# Altium PCB Control Board.PcbDoc
Units mm, origin at the board's own origin, x right, y up, seen from the top; angles counter-clockwise.
Board outline 33 x 89 mm, 2 copper layers (Top Layer, Bottom Layer); 29 components, 59 nets, 122 pads, 0 vias.
Unrouted connection lines stored in the file: 69.
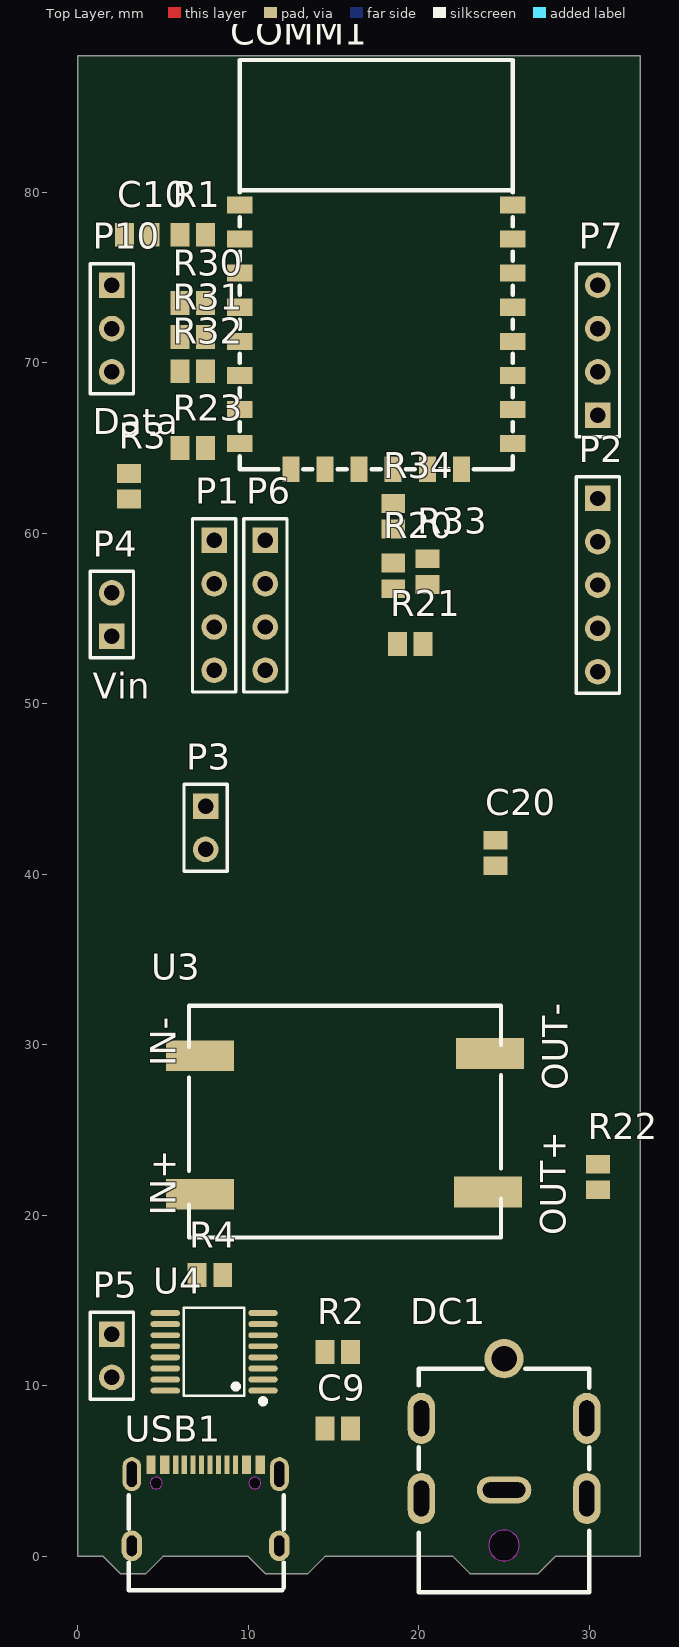
[diagram p0: Top Layer view]
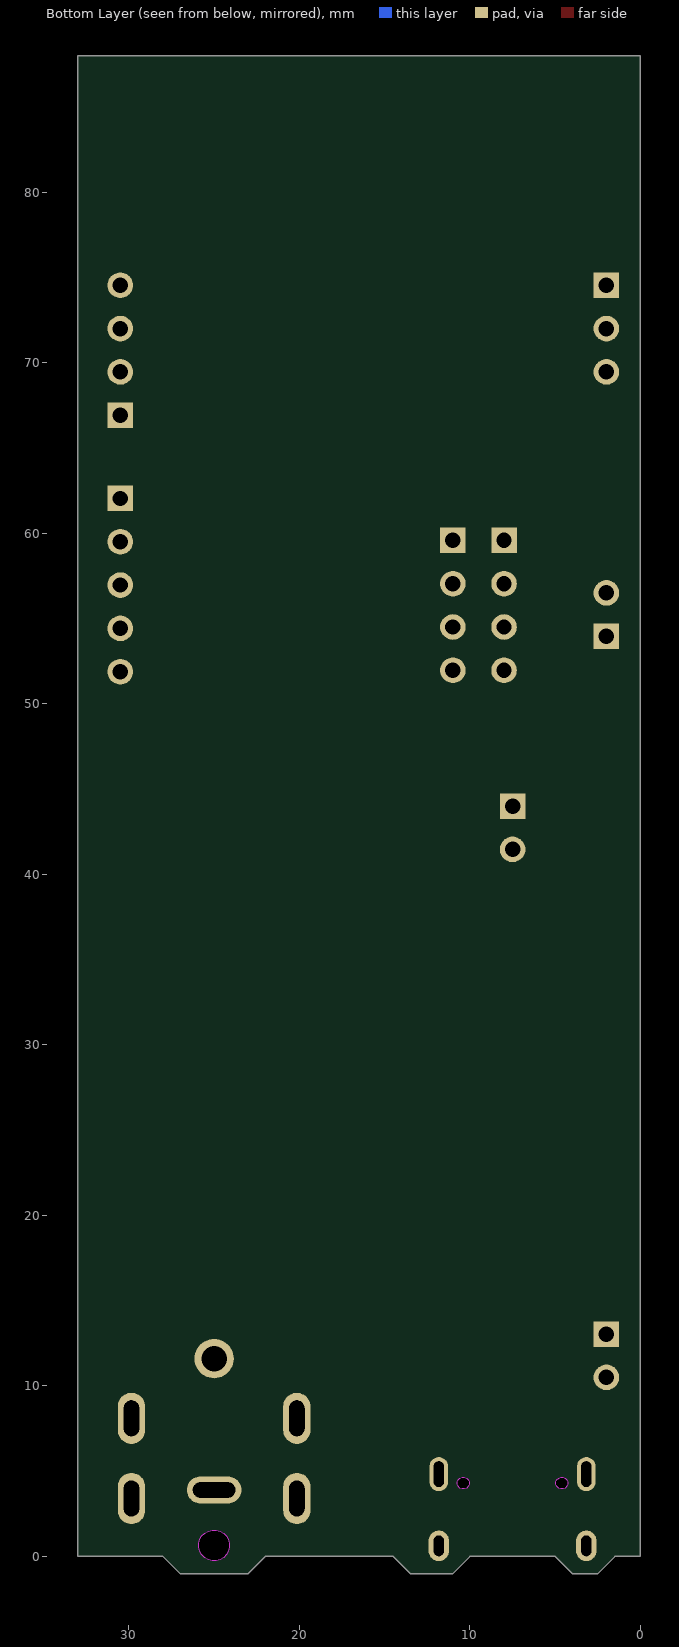
[diagram p1: Bottom Layer view, seen from below]

## Layer stack, top to bottom
Top Solder: solder mask 0.0102, Solder Resist, Dk 3.5
Top Layer: signal copper 0.0356
Dielectric 1: dielectric 0.32, FR-4, Dk 4.8
Bottom Layer: signal copper 0.0356
Bottom Solder: solder mask 0.0102, Solder Resist, Dk 3.5

## Board outline
10,0 11,-1 13.5,-1 14.5,0 22,0 23,-1 27,-1 28,0 33,0 33,88 0,88 0,0 1.5,0 2.5,-1 4,-1 5,0

## Design rules (kind name [scope] priority, off if disabled: settings)
Clearance [All] p1: gap=0.254 ignorepadtopadclearanceinfootprint=FALSE except(0: Arc-Hole Track-Hole SMDPad-Hole THPad-Hole Via-Hole Fill-Hole Poly-Hole Region-Hole Text-Hole)
PolygonConnect [All] p1: connectstyle=Relief reliefconductorwidth=0.254 reliefentries=4 polygonreliefangle="90 Angle" airgapwidth=0.254
RoomDefinition "Control Board" [InComponentClass('Control Board')] p1: confinementstyle=ConfineIn formatcopy=TRUE lockcomponents=FALSE outline 0,-2.5 33,-2.5 33,88 0,88
RoutingVias [All] p1: holewidth=0.711 width=1.27 viastyle="Through Hole" minholewidth=0.711 minwidth=1.27 maxholewidth=0.711 maxwidth=1.27
SolderMaskExpansion [All] p1: expansion=0.102 istentingtop=FALSE
Width [All] p1: maxlimit=0.254 minlimit=0.254 preferedwidth=0.254
30 further rules are at their usual default settings.

## Components (designator, comment, footprint, x,y, rotation, side; value= is the part's Value field where it differs from the comment)
C9 "Cap" C0805 15.25,7.5 r0 top value=1μF
C10 "Cap" C0805 3.5,77.5 r180 top value=1μF
C20 "Cap" C0805 24.5,41.25 r90 top value=0.1μF
COMM1 "PB-03F" BULETM-SMD_PB-03F 17.5,71.5 r0 top
DC1 "DC-042C-Z-2.5-A" DC-IN-TH_DC-042C-Z-2.5-A 25,7.5 r90 top
P1 "CH340 Write" HDR1X4 8,59.58 r270 top
P2 "Encoder" HDR1X5 30.5,62.04 r270 top
P3 "Thermo" HDR1X2 7.5,44 r270 top
P4 "Vin" HDR1X2 2,53.96 r90 top
P5 "Switch" HDR1X2 2,13.04 r270 top
P6 "Fan Header" HDR1X4 11,59.58 r270 top
P7 "Display" HDR1X4 30.5,66.92 r90 top
P10 "Data" HDR1X3 2,74.54 r270 top
R1 "Res1" C0805 6.75,77.5 r0 top value=20K
R2 "Res1" C0805 15.25,12 r180 top value=3K
R3 "Res1" C0805 3,62.75 r90 top value=5.1K
R4 "Res1" C0805 7.75,16.5 r0 top value=5.1K
R20 "Res1" C0805 18.5,57.5 r90 top value=10K
R21 "Res1" C0805 19.5,53.5 r0 top value=10K
R22 "Res1" C0805 30.5,22.25 r90 top value=10K
R23 "Res1" C0805 6.75,65 r180 top value=2K
R30 "Res1" C0805 6.75,73.5 r180 top value=100Ω
R31 "Res1" C0805 6.75,71.5 r0 top value=100Ω
R32 "Res1" C0805 6.75,69.5 r180 top value=100Ω
R33 "Res1" C0805 20.5,57.75 r90 top value=100Ω
R34 "Res1" C0805 18.5,61 r270 top value=100Ω
U3 "" "PCBComponent_1 - duplicate" 16.5,25.5 r0 top
U4 "IP2721" TSSOP-16_L5.0-W4.4-P0.65-LS6.4-BL 8,12 r90 top
USB1 "TYPE-C 16PIN 2MD(073)" USB-C-SMD_TYPE-C-6PIN-2MD-073 7.5,3 r0 top

## Footprints (in the part's own frame and the unit in brackets; to place one, negate y for a bottom-side part, rotate by r counter-clockwise, add the part's x,y. Pads: shape width x height; smd on the part's side, far side on the other; paste and mask are expansions set on the pad)
BULETM-SMD_PB-03F [mm]
  rect 1.5x1 smd paste+0 mask+0.05: 1(-8,7.75) 2(-8,5.75) 3(-8,3.75) 4(-8,1.75) 5(-8,-0.25) 6(-8,-2.25) 7(-8,-4.25) 8(-8,-6.25) 15(8,-6.25) 16(8,-4.25) 17(8,-2.25) 18(8,-0.25) 19(8,1.75) 20(8,3.75) 21(8,5.75) 22(8,7.75)
  rect 1x1.5 smd paste+0 mask+0.05: 9(-5,-7.75) 10(-3,-7.75) 11(-1,-7.75) 12(1,-7.75) 13(3,-7.75) 14(5,-7.75)
  silkscreen extent -8,-7.75 8,16.25
C0805 [mm] "Chip Capacitor, Body 2.0x1.3mm, IPC High Density"
  rect 1.1x1.4 smd: 1(-0.75,0) 2(0.75,0)
  body extent -1.1,-0.72 1.1,0.72, height 1.4
DC-IN-TH_DC-042C-Z-2.5-A [mm]
  oval 3x1.6 hole 0.9 slot 2.1 at 0 deg copper offset 0,0: 1(-4.1,-4.85) 1(-4.1,4.85) 1(0.6,4.85) 1(0.6,-4.85)
  oval 1.6x3.2 hole 0.9 slot 2.5 at 90 deg: 2(-3.6,0)
  round 2.3 hole 1.5 copper offset 0,0: 3(4.1,0)
  Keep-Out Layer board cut-out: -5.95,0 -5.95,0.119 -6.011,0.348 -6.13,0.553 -6.298,0.72 -6.503,0.839 -6.732,0.9 -6.969,0.9 -7.198,0.839 -7.403,0.72 -7.57,0.553 -7.689,0.347 -7.75,0.119 -7.75,0 -7.75,-0.118 -7.689,-0.347 -7.57,-0.553 -7.403,-0.72 -7.198,-0.839 -6.969,-0.9 -6.732,-0.9 -6.503,-0.839 -6.298,-0.72 -6.13,-0.552 -6.011,-0.347 -5.95,-0.118 -5.95,0 -5.95,0
  Multi-Layer pour cut-out: -5.95,0 -5.95,0.119 -6.011,0.348 -6.13,0.553 -6.298,0.72 -6.503,0.839 -6.732,0.9 -6.969,0.9 -7.198,0.839 -7.403,0.72 -7.57,0.553 -7.689,0.347 -7.75,0.119 -7.75,0 -7.75,-0.118 -7.689,-0.347 -7.57,-0.553 -7.403,-0.72 -7.198,-0.839 -6.969,-0.9 -6.732,-0.9 -6.503,-0.839 -6.298,-0.72 -6.13,-0.552 -6.011,-0.347 -5.95,-0.118 -5.95,0 -5.95,0
  silkscreen extent -9.6,-5 3.5,5
HDR1X2 [mm] "Connector; Header; 2 Position"
  rect 1.5x1.5 hole 0.9: 1(0,0)
  round 1.5 hole 0.9: 2(2.54,0)
  silkscreen extent -1.27,-1.27 3.81,1.27
HDR1X3 [mm] "Connector; Header; 3 Position"
  rect 1.5x1.5 hole 0.9: 1(0,0)
  round 1.5 hole 0.9: 2(2.54,0) 3(5.08,0)
  silkscreen extent -1.27,-1.27 6.35,1.27
HDR1X4 [mm] "Connector; Header; 4 Position"
  rect 1.5x1.5 hole 0.9: 1(0,0)
  round 1.5 hole 0.9: 2(2.54,0) 3(5.08,0) 4(7.62,0)
  silkscreen extent -1.27,-1.27 8.89,1.27
HDR1X5 [mm] "Connector; Header; 5 Position"
  rect 1.5x1.5 hole 0.9: 1(0,0)
  round 1.5 hole 0.9: 2(2.54,0) 3(5.08,0) 4(7.62,0) 5(10.16,0)
  silkscreen extent -1.27,-1.27 11.43,1.27
"PCBComponent_1 - duplicate" [mm]
  rect 4x1.8 smd paste+0 mask+0.051: 1(-9.335,3.867) 2(-9.335,-4.261) 3(7.683,3.994) 4(7.556,-4.134)
  silkscreen extent -9.97,-6.8 8.32,6.8
TSSOP-16_L5.0-W4.4-P0.65-LS6.4-BL [mm]
  oval 0.343x1.731 smd: 1(-2.275,-2.866) 2(-1.625,-2.866) 3(-0.975,-2.866) 4(-0.325,-2.866) 5(0.325,-2.866) 6(0.975,-2.866) 7(1.625,-2.866) 8(2.275,-2.866) 9(2.275,2.866) 10(1.625,2.866) 11(0.975,2.866) 12(0.325,2.866) 13(-0.325,2.866) 14(-0.975,2.866) 15(-1.625,2.866) 16(-2.275,2.866)
  silkscreen extent -3.05,-3.02 2.58,1.77
USB-C-SMD_TYPE-C-6PIN-2MD-073 [mm]
  rect 0.55x1.1 smd paste-100 mask+0.05: 1(-3.2,2.375) 2(-2.4,2.375) 11(2.4,2.375) 12(3.2,2.375)
  rect 0.3x1.1 smd paste-100 mask+0.05: 3(-1.75,2.375) 4(-1.25,2.375) 5(-0.75,2.375) 6(-0.25,2.375) 7(0.25,2.375) 8(0.75,2.375) 9(1.25,2.375) 10(1.75,2.375)
  oval 1.1x2 hole 0.6 slot 1.5 at 90 deg paste+0 mask+0.05: 13(-4.325,1.825) 14(4.325,1.825)
  oval 1.2x1.8 hole 0.6 slot 1.2 at 90 deg paste+0 mask+0.05: 13(-4.325,-2.375) 14(4.325,-2.375)
  Keep-Out Layer board cut-out: 3.24,1.305 3.239,1.374 3.185,1.5 3.086,1.597 2.959,1.649 2.821,1.649 2.694,1.597 2.596,1.5 2.541,1.374 2.54,1.305 2.541,1.236 2.596,1.11 2.694,1.013 2.821,0.961 2.959,0.961 3.086,1.013 3.185,1.11 3.239,1.236 3.24,1.305 3.24,1.305
  Keep-Out Layer board cut-out: -2.54,1.305 -2.541,1.374 -2.595,1.5 -2.694,1.597 -2.821,1.649 -2.959,1.649 -3.086,1.597 -3.184,1.5 -3.239,1.374 -3.24,1.305 -3.239,1.236 -3.184,1.11 -3.086,1.013 -2.959,0.961 -2.821,0.961 -2.694,1.013 -2.595,1.11 -2.541,1.236 -2.54,1.305 -2.54,1.305
  Multi-Layer pour cut-out: 3.24,1.305 3.239,1.374 3.185,1.5 3.086,1.597 2.959,1.649 2.821,1.649 2.694,1.597 2.596,1.5 2.541,1.374 2.54,1.305 2.541,1.236 2.596,1.11 2.694,1.013 2.821,0.961 2.959,0.961 3.086,1.013 3.185,1.11 3.239,1.236 3.24,1.305 3.24,1.305
  Multi-Layer pour cut-out: -2.54,1.305 -2.541,1.374 -2.595,1.5 -2.694,1.597 -2.821,1.649 -2.959,1.649 -3.086,1.597 -3.184,1.5 -3.239,1.374 -3.24,1.305 -3.239,1.236 -3.184,1.11 -3.086,1.013 -2.959,0.961 -2.821,0.961 -2.694,1.013 -2.595,1.11 -2.541,1.236 -2.54,1.305 -2.54,1.305
  silkscreen extent -4.5,-4.97 4.57,0.6

## Part data
C9 C10 C20: "Capacitor", LatestRevisionDate=17-Jul-2002, LatestRevisionNote="Re-released for DXP Platform.", PackageDescription="Radial Cap, Thru-Hole; 2 Leads; 0.3 in Pin Spacing", PackageReference=RAD-0.3, Published=8-Jun-2000, Publisher="Altium Limited"
COMM1: JLCPCB Part Class="Extended Part", Manufacturer=Ai-Thinker(安信可), Add into BOM=yes, Convert to PCB=yes, Datasheet=https://atta.szlcsc.com/upload/public/pdf/source/20220707/D814A4298A3D5539355587756A11D322.pdf, Device=PB-03F, LCSC Part Name=PB-03F, Manufacturer Part=PB-03F, Supplier=LCSC, Supplier Footprint=SMD,16x24mm, Supplier Part=c, Symbol=PB-03F
DC1: Current Rating (Max)=10A, JLCPCB Part Class="Extended Part", LCSC Part Name="DC电源插座 内径:2.5mm 外径:6mm 不带开关", Manufacturer="XKB Connectivity(中国星坤)", Operating Temperature Range=-20℃~+70℃, Soldering Temperature(Max)=260℃, Voltage Rating (Max)=20V, Add into BOM=yes, Connector Type=DC电源插座, Contact Material=黄铜, Convert to PCB=yes, Datasheet=https://atta.szlcsc.com/upload/public/pdf/source/20211011/A75ED48B9CCFCCBC07979616CD543B30.pdf, Device=DC-042C-Z-2.5-A, Inside Contact Diameter=2.5mm, Manufacturer Part=DC-042C-Z-2.5-A, Mounting Style=弯插, Outside Contact Diameter=6mm, Supplier=LCSC, Supplier Footprint=插件, Supplier Part=C706901, Symbol=DC-042C-Z-2.5-A
P1 P6 P7: library part "Header 4", "Header, 4-Pin", LatestRevisionDate=17-Jul-2002, LatestRevisionNote="Re-released for DXP Platform.", Publisher="Altium Limited"
P2: library part "Header 5", "Header, 5-Pin", LatestRevisionDate=17-Jul-2002, LatestRevisionNote="Re-released for DXP Platform.", Publisher="Altium Limited"
P3 P4 P5: library part "Header 2", "Header, 2-Pin", LatestRevisionDate=17-Jul-2002, LatestRevisionNote="Re-released for DXP Platform.", Publisher="Altium Limited"
P10: library part "Header 3", "Header, 3-Pin", LatestRevisionDate=17-Jul-2002, LatestRevisionNote="Re-released for DXP Platform.", Publisher="Altium Limited"
R1 R2 R3 R4 R20 R21 R22 R23 R30 R31 R32 R33 R34: "Resistor", LatestRevisionDate=17-Jul-2002, LatestRevisionNote="Re-released for DXP Platform.", PackageDescription="Axial Device, Thru-Hole; 2 Leads; 0.3 in Pin Spacing", PackageReference=AXIAL-0.3, Published=8-Jun-2000, Publisher="Altium Limited"
U3: library part CN3903模块, Device=CN3903
U4: JLCPCB Part Class="Extended Part", Manufacturer=INJOINIC(英集芯), Add into BOM=yes, Convert to PCB=yes, Datasheet=https://atta.szlcsc.com/upload/public/pdf/source/20200610/C603176_729C2C55A9E6451BDA9FCB913350E23E.pdf, Device=IP2721, LCSC Part Name=IP2721, Manufacturer Part=IP2721, Supplier=LCSC, Supplier Footprint=TSSOP-16, Supplier Part=C603176, Symbol=IP2721
USB1: Current Rating - Power (Max)=5A, JLCPCB Part Class="Extended Part", LCSC Part Name="Type-C 母 卧贴", Manufacturer="SHOU HAN(首韩)", Operating Temperature Range=-25℃~+85℃, Add into BOM=yes, Connector Type=Type-C, Convert to PCB=yes, Datasheet=https://atta.szlcsc.com/upload/public/pdf/source/20211123/39B17C16241EAC15C5E277BDA434118E.pdf, Device="TYPE-C 16PIN 2MD(073)", Gender=母, Manufacturer Part="TYPE-C 16PIN 2MD(073)", Mounting Style=卧贴, Number of Contacts=16P, Number of Ports=1, Standard=-, Supplier=LCSC, Supplier Footprint=SMD, Supplier Part=C2765186, Symbol="TYPE-C 16PIN 2MD(073)"

## Nets (pads, with @x,y where several pads share a name; then routed paths per layer and width w, separated by ;. In a path a pad name is that pad's centre, name@x,y a point inside that pad or via, vN(x,y) a via of type N, cw(c..) or ccw(c..) an arc to the next point about the centre after c; other vN are vias at no path point)
GND: C9.2 C10.2 C20.1 COMM1.15 DC1.1 DC1.2 P1.4 P3.2 P4.2 P6.4 P7.1 R2.1 R3.2 R4.2 U3.1 U3.3 U4.5 USB1.1 USB1.12
"LED1 +": 
"LED1 -": 
"LED2 +": 
"LED2 -": 
Net1_1: 
Net1_2: 
NetC5_1: 
NetC8_1: 
NetC9_1: C9.1 U4.2 USB1.2 USB1.11
NetC10_1: C10.1 P5.2 R1.2 U4.11 U4.16
NetC11_2: 
NetC16_1: 
NetC19_1: 
NetC20_2: C20.2 P2.3 P2.5
NetC21_2: 
NetCOMM1_2: COMM1.2 R1.1 R2.2
NetCOMM1_3: COMM1.3 P2.4 R22.2
NetCOMM1_4: COMM1.4 R30.2
NetCOMM1_5: COMM1.5 R31.2
NetCOMM1_6: COMM1.6 R32.2
NetCOMM1_8: COMM1.8 P1.1 P7.2 R20.1 R21.1 R22.1 R23.2 U3.4
NetCOMM1_10: COMM1.10 P6.1
NetCOMM1_11: COMM1.11 P6.2
NetCOMM1_12: COMM1.12 R34.1
NetCOMM1_13: COMM1.13 R33.1
NetCOMM1_18: COMM1.18 P7.4
NetCOMM1_19: COMM1.19 P7.3
NetCOMM1_20: COMM1.20 P3.1 R23.1
NetCOMM1_21: COMM1.21 P1.3
NetCOMM1_22: COMM1.22 P1.2
NetD1_1: 
NetDC1_3: DC1.3 P4.1 P5.1 P6.3 U3.2
NetP2_1: P2.1 R20.2 R34.2
NetP2_2: P2.2 R21.2 R33.2
NetP8_1: 
NetP8_2: 
NetP8_3: 
NetP10_1: P10.1 R30.1
NetP10_2: P10.2 R31.1
NetP10_3: P10.3 R32.1
NetQ1_1: 
NetQ1_3: 
NetQ2_1: 
NetQ2_3: 
NetQ3_1: 
NetQ3_3: 
NetQ4_1: 
NetQ4_3: 
NetR3_1: R3.1 U4.12 USB1.10
NetR4_1: R4.1 U4.13 USB1.4
NetR5_1: 
NetR7_2: 
NetR8_2: 
NetR9_2: 
NetR10_1: 
NetR12_2: 
NetR13_2: 
NetR14_2: 
pads on no net: COMM1.1 COMM1.7 COMM1.9 COMM1.14 COMM1.16 COMM1.17 U4.1 U4.3 U4.4 U4.6 U4.7 U4.8 U4.9 U4.10 U4.14 U4.15 USB1.3 USB1.5 USB1.6 USB1.7 USB1.8 USB1.9 USB1.13 USB1.14

## Text inside footprints (layer, text, board x,y; h text height)
U3: Top Overlay "OUT+" at 28.617,18.826 h1.5 r90; Top Overlay "OUT-" at 28.743,27.335 h1.5 r90; Top Overlay "IN+" at 5.757,19.969 h1.5 r90; Top Overlay "IN-" at 5.757,28.732 h1.5 r90